# EAGLE board PROIECT TSC v69 (EAGLE 9.7.0)
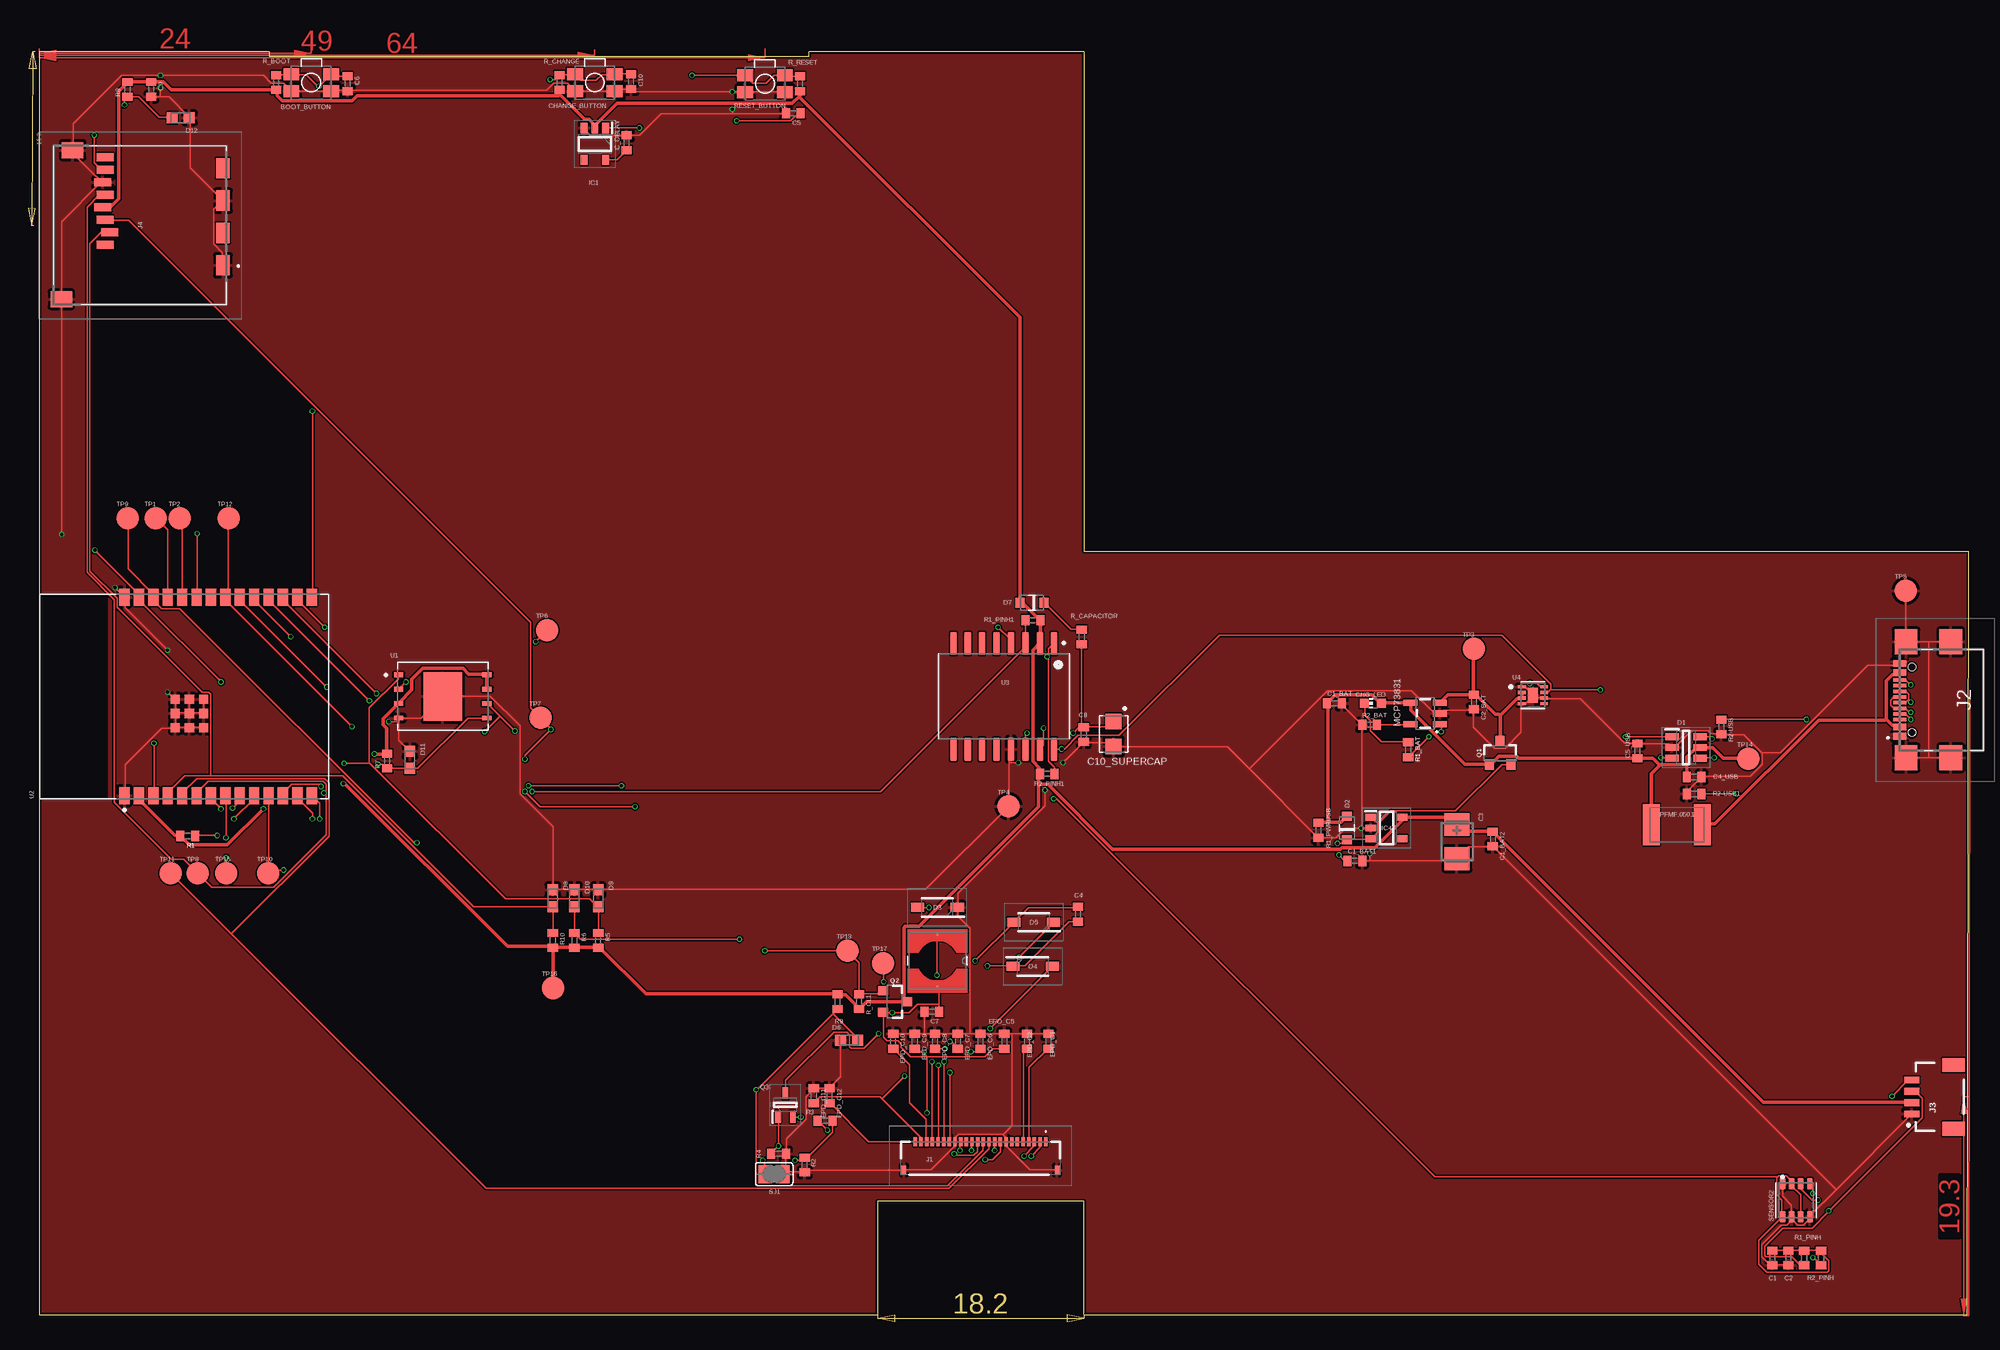
[diagram p0: board, top side]
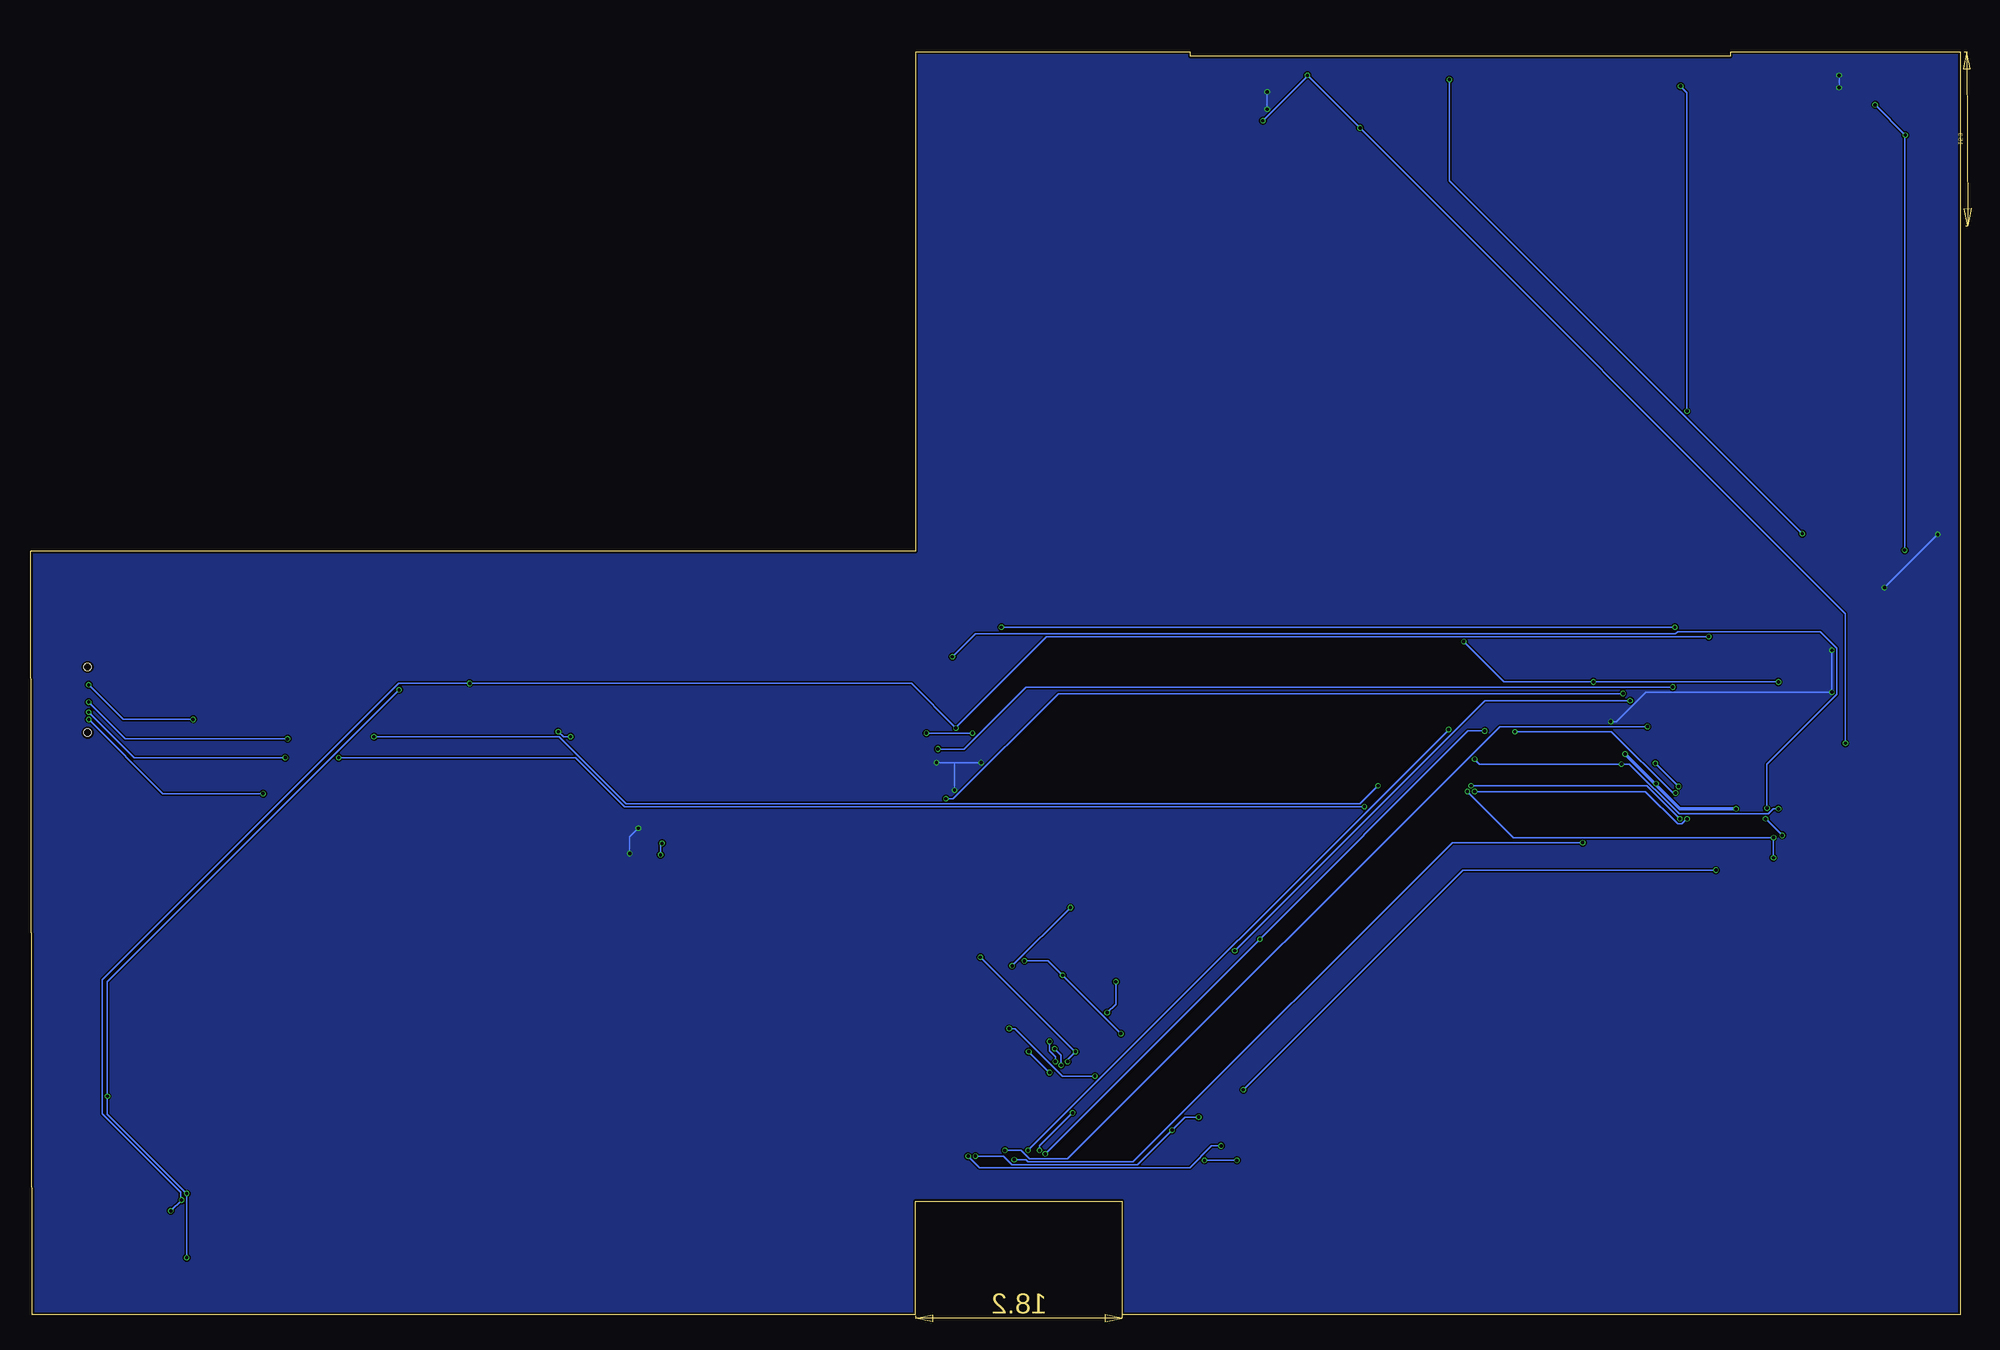
[diagram p1: board, bottom side, seen from below]

Size 170.1 x 111.3 mm. Coordinates in mm from the lower left corner, seen from the top.
Outline: 0,0 73.9,0 73.9,10 92.1,10 92.1,0 170,0 170.1,67.3 92.1,67.3 92.1,111.3 67.9,111.3 67.9,110.9 20.3,110.9 20.3,111.3 0,111.3 0,0
Copper layers (1*16): Top 0.035mm / dielectric 1.6mm / Bottom 0.035mm
Design rules "jlcpcb-2layers.edru": minimum track width 5mil, minimum drill 0.3mm, track to track 5mil, track to pad 5mil, pad to pad 5mil, via to via 5mil, smd to smd 5mil, copper to edge 0.2mm, drill to drill 6mil, minimum pad ring 10mil, minimum via ring 3mil, stop-mask expansion 4mil, vias tented up to drill 0mil, thermal gap 10mil
Net classes: 1 POWER: width 0.3 mm

## Footprints (pad centres in the part's own frame; a part is rotated, then mirrored left to right if it is on the bottom)
MYBUTTON = smd 1.4 x 1.05: 1 1.75,0.75; 2 -1.75,0.75; 3 -1.75,-0.75; 4 1.75,-0.75
EAGLE-LTSPICE_C0402 = smd 0.7 x 0.9: 1 -0.65,0; 2 0.65,0
RCL_CT3528 = smd 2 x 2.2: + -1.5,0; - 1.5,0
CAPCP3225X100N = smd 1.4 x 1.4: 1 -1.1,0; 2 1.1,0
ADAFRUIT_CHIP-LED0603 = smd 0.8 x 0.8: A 0,-0.75; C 0,0.75
SOT95P280X145-6N = smd 1.2 x 0.6: 1 -1.25,0.95; 2 -1.25,0; 3 -1.25,-0.95; 4 1.25,-0.95; 5 1.25,0; 6 1.25,0.95
ESP32_WROVER_AVX---SD0805S020S1R0_AVX_SD0805S020S1R0_0 = smd 0.8 x 0.9: 1 -1.05,0; 2 1.05,0
SOD3716X135N = smd 1.15 x 0.8: 1 -1.75,0; 2 1.75,0
DIOC1608X36N = smd 0.97 x 0.94: 1 -0.75,0; 2 0.75,0
SOT95P280X125-5N = smd 0.9 x 0.6: 1 -1.4,0.95; 2 -1.4,0; 3 -1.4,-0.95; 4 1.4,-0.95; 5 1.4,0.95
SOT95P280X120-5N = smd 0.9 x 0.6: 1 -1.4,0.95; 2 -1.4,0; 3 -1.4,-0.95; 4 1.4,-0.95; 5 1.4,0.95
FH34SRJ24S05SH99 = smd 0.3 x 0.8: 1 5.75,1.45; 2 5.25,1.45; 3 4.75,1.45; 4 4.25,1.45; 5 3.75,1.45; 6 3.25,1.45; 7 2.75,1.45; 8 2.25,1.45; 9 1.75,1.45; 10 1.25,1.45; 11 0.75,1.45; 12 0.25,1.45; 13 -0.25,1.45; 14 -0.75,1.45; 15 -1.25,1.45; 16 -1.75,1.45; 17 -2.25,1.45; 18 -2.75,1.45; 19 -3.25,1.45; 20 -3.75,1.45; 21 -4.25,1.45; 22 -4.75,1.45; 23 -5.25,1.45; 24 -5.75,1.45 | smd 0.4 x 0.8: MP1 6.75,-1.05; MP2 -6.75,-1.05
SAMACSYS_PARTS_USB4110GFA = smd 0.3 x 1.15: A1 -3.35,3.678; A4 -2.55,3.678; A5 -1.25,3.678; A6 -0.25,3.678; A7 0.25,3.678; A8 1.25,3.678; A9 2.55,3.678; A12 3.35,3.678; B1 3.05,3.678; B4 2.25,3.678; B5 1.75,3.678; B6 0.75,3.678; B7 -0.75,3.678; B8 -1.75,3.678; B9 -2.25,3.678; B12 -3.05,3.678 | smd 2.18 x 2: MP1 -5.11,-0.827; MP2 5.11,-0.827; MP3 -5.11,3.103; MP4 5.11,3.103 | hole 0.65: -2.89,2.603; 2.89,2.603
JST04_1MM_RA = smd 0.6 x 1.35: 1 -1.5,0; 2 -0.5,0; 3 0.5,0; 4 1.5,0 | smd 1.2 x 2: NC1 2.8,-3.675; NC2 -2.8,-3.675
112ATAARR03ATTEND = smd 1.8 x 1.2: G1 10.6,10.4; G2 4.9,10.4; S1 7.75,10.4; S2 2.05,10.4 | smd 1.4 x 1.9: G3 13.6,-3.85; G4 0.45,-2.85 | smd 0.7 x 1.5: P1 8.8,0; P2 7.7,0.4; P3 6.6,0; P4 5.5,-0.2; P5 4.4,0; P6 3.3,-0.2; P7 2.2,0; P8 1.1,0
IND_4828-WE-TPC_WRE = smd 0.127 x 0.127: 1 -2.286,0; 2 2.286,0
ESP32_WROVER_SPARKFUN-IC-POWER_SOT23-5 = smd 0.55 x 1.2: 1 -0.95,-1.3; 2 0,-1.3; 3 0.95,-1.3; 4 0.95,1.3; 5 -0.95,1.3
ESP32C6_VARISTOR_CT/CN1812 = smd 1.5 x 3.6: 1 -2.25,0; 2 2.25,0
ESP32_WROVER_SPARKFUN-DISCRETESEMI_SOT23-3 = smd 0.8 x 0.9: 1 -0.95,-1; 2 0.95,-1; 3 0,1.1
SOT65P210X110-3N = smd 1.05 x 0.5: 1 -1.05,0.65; 2 -1.05,-0.65; 3 1.05,0
ESP32_WROVER_EAGLE-LTSPICE_R0402 = smd 0.7 x 0.9: 1 -0.65,0; 2 0.65,0
ESP32_WROVER_BME680_PSON80P300X300X100-8N = smd 1.016 x 0.5: 1 1.458,1.2; 2 1.458,0.4; 3 1.458,-0.4; 4 1.458,-1.2; 5 -1.458,-1.22; 6 -1.458,-0.4; 7 -1.458,0.4; 8 -1.458,1.2
SJ = smd 1.168 x 1.6: 1 -0.762,0; 2 0.762,0
TP20R = smd 2 x 2: TP 0,0
SON127P600X800X80-9N = smd 0.94 x 0.44: 1 -3.895,1.905; 2 -3.895,0.635; 3 -3.895,-0.635; 4 -3.895,-1.905; 5 3.895,-1.905; 6 3.895,-0.635; 7 3.895,0.635; 8 3.895,1.905 | smd 3.4 x 4.3: 9 0,0
XCVR_ESP32-C6-WROOM-1-N8 = smd 1.5 x 0.9: 1 -8.75,5.26; 2 -8.75,3.99; 3 -8.75,2.72; 4 -8.75,1.45; 5 -8.75,0.18; 6 -8.75,-1.09; 7 -8.75,-2.36; 8 -8.75,-3.63; 9 -8.75,-4.9; 10 -8.75,-6.17; 11 -8.75,-7.44; 12 -8.75,-8.71; 13 -8.75,-9.98; 14 -8.75,-11.25; 15 8.75,-11.25; 16 8.75,-9.98; 17 8.75,-8.71; 18 8.75,-7.44; 19 8.75,-6.17; 20 8.75,-4.9; 21 8.75,-3.63; 22 8.75,-2.36; 23 8.75,-1.09; 24 8.75,0.18; 25 8.75,1.45; 26 8.75,2.72; 27 8.75,3.99; 28 8.75,5.26 | smd 0.8 x 0.8: 29_1 -2.755,0.79; 29_2 -1.505,0.79; 29_3 -0.255,0.79; 29_4 -2.755,-0.46; 29_5 -1.505,-0.46; 29_6 -0.255,-0.46; 29_7 -2.755,-1.71; 29_8 -1.505,-1.71; 29_9 -0.255,-1.71
SOIC127P1032X265-16N = smd 2.05 x 0.59: 1 -4.655,4.445; 2 -4.655,3.175; 3 -4.655,1.905; 4 -4.655,0.635; 5 -4.655,-0.635; 6 -4.655,-1.905; 7 -4.655,-3.175; 8 -4.655,-4.445; 9 4.655,-4.445; 10 4.655,-3.175; 11 4.655,-1.905; 12 4.655,-0.635; 13 4.655,0.635; 14 4.655,1.905; 15 4.655,3.175; 16 4.655,4.445
SON50P200X200X80-9N = smd 0.76 x 0.27: 1 -0.985,0.75; 2 -0.985,0.25; 3 -0.985,-0.25; 4 -0.985,-0.75; 5 0.985,-0.75; 6 0.985,-0.25; 7 0.985,0.25; 8 0.985,0.75 | smd 0.9 x 1.3: 9 0,0

## Placement (x,y rotation side)
BOOT_BUTTON  BUTTON_CUSYOMV1  [MYBUTTON]  24,108.6 180 top
C1  100nF  [EAGLE-LTSPICE_C0402]  152.8,5 270 top
C1_BAT  4.7uF  [EAGLE-LTSPICE_C0402]  114.2,53.9 0 top
C1_BAT1  4.7uF  [EAGLE-LTSPICE_C0402]  116,40 0 top
C1_BAT2  4.7uF  [EAGLE-LTSPICE_C0402]  128.15,41.94 270 top
C2  100nF  [EAGLE-LTSPICE_C0402]  154.2,5 270 top
C2_BAT  4.7uF  [EAGLE-LTSPICE_C0402]  126.5,54 270 top
C3  100uF  [RCL_CT3528]  125,41.7 270 top
C4  4.7uF/25V  [EAGLE-LTSPICE_C0402]  91.6,35.3 90 top
C4_USB  100nF  [EAGLE-LTSPICE_C0402]  145.9,47.4 0 top
C5  1uF  [EAGLE-LTSPICE_C0402]  66.5,105.9 180 top
C5_USB  4.7uF  [EAGLE-LTSPICE_C0402]  140.9,49.7 90 top
C6  100nF  [EAGLE-LTSPICE_C0402]  27.2,108.5 270 top
C7  10uF  [EAGLE-LTSPICE_C0402]  78.7,26.7 180 top
C8  100nF  [EAGLE-LTSPICE_C0402]  92.1,51.14 90 top
C9  100uF  [EAGLE-LTSPICE_C0402]  9.9,108 270 top
C10  100nF  [EAGLE-LTSPICE_C0402]  52.2,108.68 270 top
C10_SUPERCAP  CPH3225A  [CAPCP3225X100N]  94.73,51.19 270 top
C_DELAY  100nF  [EAGLE-LTSPICE_C0402]  51.8,103.3 90 top
CHANGE_BUTTON  BUTTON_CUSYOMV1  [MYBUTTON]  49,108.6 180 top
CHG_LED  [ADAFRUIT_CHIP-LED0603]  117.6,53.9 90 top
D1  USBLC6-2SC6Y  [SOT95P280X145-6N]  145.2,50 0 top
D2  ESP32_WROVER_AVX---SD0805S020S1R0_AVX_SD0805S020S1R0_0_0AVX_SD0805S020S1R0_0_0  [ESP32_WROVER_AVX---SD0805S020S1R0_AVX_SD0805S020S1R0_0]  115.3,42.9 90 top
D3  MBR0530  [SOD3716X135N]  79.2,35.9 180 top
D4  MBR0530  [SOD3716X135N]  87.6,30.7 0 top
D5  MBR0530  [SOD3716X135N]  87.7,34.6 180 top
D6  PGB1010603MR  [DIOC1608X36N]  71.4,24.2 0 top
D7  ESP32_WROVER_AVX---SD0805S020S1R0_AVX_SD0805S020S1R0_0_0AVX_SD0805S020S1R0_0_0  [ESP32_WROVER_AVX---SD0805S020S1R0_AVX_SD0805S020S1R0_0]  87.54,62.76 180 top
D8  PGB1010603MR  [DIOC1608X36N]  45.3,36.7 270 top
D9  PGB1010603MR  [DIOC1608X36N]  49.3,36.7 270 top
D10  PGB1010603MR  [DIOC1608X36N]  47.2,36.7 270 top
D11  PGB1010603MR  [DIOC1608X36N]  32.7,48.9 270 top
D12  PGB1010603MR  [DIOC1608X36N]  12.5,105.5 180 top
EPD_C1  1uF/50V  [EAGLE-LTSPICE_C0402]  89,24.1 270 top
EPD_C2  1uF/50V  [EAGLE-LTSPICE_C0402]  87.1,24.1 270 top
EPD_C5  1uF/50V  [EAGLE-LTSPICE_C0402]  85.1,24.1 270 top
EPD_C6  1uF/50V  [EAGLE-LTSPICE_C0402]  83,24.1 270 top
EPD_C7  1uF/50V  [EAGLE-LTSPICE_C0402]  81,24.1 270 top
EPD_C8  1uF/50V  [EAGLE-LTSPICE_C0402]  79,24.1 270 top
EPD_C9  1uF/50V  [EAGLE-LTSPICE_C0402]  77.2,24.1 270 top
EPD_C10  1uF/50V  [EAGLE-LTSPICE_C0402]  75.3,24.1 270 top
EPD_C11  1uF/50V  [EAGLE-LTSPICE_C0402]  68.3,19.3 270 top
EPD_C12  1uF/50V  [EAGLE-LTSPICE_C0402]  69.7,19.3 270 top
IC1  BD5229G-TR  [SOT95P280X125-5N]  49,103.2 270 top
IC4  XC6220A331MR-G  [SOT95P280X120-5N]  118.8,42.9 0 top
J1  FH34SRJ-24S-0.5SH_99_  [FH34SRJ24S05SH99]  83,13.8 0 top
J2  SAMACSYS_PARTS_USB4110-GF-A  [SAMACSYS_PARTS_USB4110GFA]  167.7,54.2 90 top
J3  QWIIC_RIGHT_ANGLE  [JST04_1MM_RA]  165.1,19.2 90 top
J4  112A-TAAR-R03_ATTEND  [112ATAARR03ATTEND]  5.82,103.1 270 top
L1  68uH  [IND_4828-WE-TPC_WRE]  79.2,31.2 270 top
MCP73831  ESP32_WROVER_SPARKFUN-IC-POWER_MCP73831  [ESP32_WROVER_SPARKFUN-IC-POWER_SOT23-5]  122.2,53 90 top
PFMF.050.1  ESP32C6_VARISTORCN1812  [ESP32C6_VARISTOR_CT/CN1812]  144.4,43.2 180 top
Q1  20V/4.2A/52mΩ/1.4W  [ESP32_WROVER_SPARKFUN-DISCRETESEMI_SOT23-3]  128.8,49.5 0 top
Q2  20V/4.2A/52mΩ/1.4W  [ESP32_WROVER_SPARKFUN-DISCRETESEMI_SOT23-3]  75.4,27.6 270 top
Q3  SI1308EDL-T1-GE3  [SOT65P210X110-3N]  65.8,18.5 90 top
R1  10k  [ESP32_WROVER_EAGLE-LTSPICE_R0402]  13.1,42.2 180 top
R1_BAT  200  [ESP32_WROVER_EAGLE-LTSPICE_R0402]  120.7,49.8 270 top
R1_PINH  10k  [ESP32_WROVER_EAGLE-LTSPICE_R0402]  155.6,5 90 top
R1_PINH1  10k  [ESP32_WROVER_EAGLE-LTSPICE_R0402]  87.62,61.21 180 top
R1_PWRUSB  100k  [ESP32_WROVER_EAGLE-LTSPICE_R0402]  112.8,42.7 90 top
R2  2.2  [ESP32_WROVER_EAGLE-LTSPICE_R0402]  67.5,13.2 90 top
R2-USB  5k1  [ESP32_WROVER_EAGLE-LTSPICE_R0402]  148.3,51.8 270 top
R2-USB1  5k1  [ESP32_WROVER_EAGLE-LTSPICE_R0402]  145.9,45.9 0 top
R2_BAT  2k  [ESP32_WROVER_EAGLE-LTSPICE_R0402]  117.3,52 0 top
R2_PINH  10k  [ESP32_WROVER_EAGLE-LTSPICE_R0402]  157.1,5 90 top
R2_PINH1  10k  [ESP32_WROVER_EAGLE-LTSPICE_R0402]  88.88,47.67 0 top
R3  0.47  [ESP32_WROVER_EAGLE-LTSPICE_R0402]  69.3,17.1 180 top
R4  10k  [ESP32_WROVER_EAGLE-LTSPICE_R0402]  65.2,14.2 180 top
R5  10k  [ESP32_WROVER_EAGLE-LTSPICE_R0402]  49.3,33 270 top
R6  10k  [ESP32_WROVER_EAGLE-LTSPICE_R0402]  47.2,33 270 top
R7  10k  [ESP32_WROVER_EAGLE-LTSPICE_R0402]  30.7,48.8 90 top
R8  10k  [ESP32_WROVER_EAGLE-LTSPICE_R0402]  7.8,108 90 top
R9  10k  [ESP32_WROVER_EAGLE-LTSPICE_R0402]  70.4,27.6 90 top
R10  10k  [ESP32_WROVER_EAGLE-LTSPICE_R0402]  45.3,33 270 top
R_BOOT  10k  [ESP32_WROVER_EAGLE-LTSPICE_R0402]  20.9,108.6 270 top
R_CAPACITOR  15  [ESP32_WROVER_EAGLE-LTSPICE_R0402]  91.92,59.74 90 top
R_CHANGE  10k  [ESP32_WROVER_EAGLE-LTSPICE_R0402]  45.9,108.61 270 top
R_CL1  10k  [ESP32_WROVER_EAGLE-LTSPICE_R0402]  72.3,27.6 270 top
R_RESET  10k  [ESP32_WROVER_EAGLE-LTSPICE_R0402]  67.1,108.5 270 top
RESET_BUTTON  BUTTON_CUSYOMV1  [MYBUTTON]  64,108.5 180 top
SENSOR2  ESP32_WROVER_BME680_BME680  [ESP32_WROVER_BME680_PSON80P300X300X100-8N]  154.9,10.1 90 top
SJ1  [SJ]  64.8,12.4 180 top
TP1  TPTP20R  [TP20R]  10.27,70.2 0 top
TP2  TPTP20R  [TP20R]  12.4,70.2 0 top
TP3  TPTP20R  [TP20R]  126.48,58.68 0 top
TP4  TPTP20R  [TP20R]  85.48,44.8 0 top
TP5  TPTP20R  [TP20R]  164.58,63.82 0 top
TP6  TPTP20R  [TP20R]  44.78,60.34 0 top
TP7  TPTP20R  [TP20R]  44.2,52.6 0 top
TP8  TPTP20R  [TP20R]  14,38.9 0 top
TP9  TPTP20R  [TP20R]  7.8,70.2 0 top
TP10  TPTP20R  [TP20R]  20.2,38.9 0 top
TP11  TPTP20R  [TP20R]  11.6,38.9 0 top
TP12  TPTP20R  [TP20R]  16.7,70.2 0 top
TP13  TPTP20R  [TP20R]  71.28,32.08 0 top
TP14  TPTP20R  [TP20R]  150.68,49 0 top
TP15  TPTP20R  [TP20R]  16.5,38.9 0 top
TP16  TPTP20R  [TP20R]  45.3,28.8 0 top
TP17  TPTP20R  [TP20R]  74.4,31 0 top
U1  W25Q512JVEIQ  [SON127P600X800X80-9N]  35.6,54.5 0 top
U2  ESP32-C6-WROOM-1-N8  [XCVR_ESP32-C6-WROOM-1-N8]  12.8,54.5 90 top
U3  DS3231SN#  [SOIC127P1032X265-16N]  85.05,54.5 270 top
U4  MAX17048G+T10  [SON50P200X200X80-9N]  131.7,54.6 0 top

## Library data of the parts
BOOT_BUTTON CHANGE_BUTTON CHG_LED PFMF.050.1 RESET_BUTTON SJ1 TP1-TP17 = DeskAssistant v19 v1
C1 C1_BAT C1_BAT1 C1_BAT2 C2 C2_BAT C4 C4_USB C5 C5_USB C6-C10 C_DELAY EPD_C1 EPD_C2 EPD_C5-EPD_C12 = DeskAssistant v19 v1; SPICEMODEL: NONE; SPICEPREFIX: C
C3 = DeskAssistant v19 v1; SPICEPREFIX: C
C10_SUPERCAP = DeskAssistant v19 v1; AVAILABILITY: Not in stock; CHECK_PRICES: https://www.snapeda.com/parts/CPH3225A/Seiko+Instruments/view-part/?ref=eda; DESCRIPTION: 11 mF (EDLC) Supercapacitor 3.3 V 1210 (3225 Metric) - -; MF: Seiko Instruments; MP: CPH3225A; PACKAGE: 1210 Seiko; PRICE: None; PURCHASE-URL: https://www.snapeda.com/api/url_track_click_mouser/?unipart_id=562593&manufacturer=Seiko Instruments&part_name=CPH3225A&search_term=None; SNAPEDA_LINK: https://www.snapeda.com/parts/CPH3225A/Seiko+Instruments/view-part/?ref=snap
D1 = DeskAssistant v19 v1; AVAILABILITY: In Stock; CHECK_PRICES: https://www.snapeda.com/parts/USBLC6-2SC6Y/STMicroelectronics/view-part/?ref=eda; DESCRIPTION: 17V Clamp 5A (8/20µs) Ipp Tvs Diode Surface Mount SOT-23-6; MF: STMicroelectronics; MP: USBLC6-2SC6Y; PACKAGE: SOT-23-6 STMicroelectronics; PRICE: None; SNAPEDA_LINK: https://www.snapeda.com/parts/USBLC6-2SC6Y/STMicroelectronics/view-part/?ref=snap
D2 D7 = DeskAssistant v19 v1; CENTROID_NOT_SPECIFIED: No; DATASHEET: http://datasheets.avx.com/schottky.pdf; DIGIKEY_DESCRIPTION: DIODE SCHOTTKY 20V 1A 0805; DIGIKEY_PART_NUMBER: 478-7800-1-ND; LEAD_FREE: yes; MF: AVX; MOUSER_PART_NUMBER: 581-SD0805S020S1R0; PACKAGE: 0805 (2012 metric); PREFIX: D; ROHS: yes; TEMPERATURE_RANGE_HIGH: +125°C; TEMPERATURE_RANGE_LOW: -55°C
D3-D5 = DeskAssistant v19 v1; AVAILABILITY: In Stock; CHECK_PRICES: https://www.snapeda.com/parts/MBR0530/Onsemi/view-part/?ref=eda; DESCRIPTION: Diode Schottky 30 V 500mA Surface Mount SOD-123; MF: ON Semiconductor; MP: MBR0530; PACKAGE: SOD-123-2 ON Semiconductor; PRICE: None; PURCHASE-URL: https://www.snapeda.com/api/url_track_click_mouser/?unipart_id=179458&manufacturer=ON Semiconductor&part_name=MBR0530&search_term=None; SNAPEDA_LINK: https://www.snapeda.com/parts/MBR0530/Onsemi/view-part/?ref=snap
D6 D8-D12 = DeskAssistant v19 v1; AVAILABILITY: In Stock; CHECK_PRICES: https://www.snapeda.com/parts/PGB1010603MR/Littelfuse/view-part/?ref=eda; DESCRIPTION: 150V (Typ) Clamp - Ipp Tvs Diode Surface Mount 0603 (1608 Metric); MF: Littelfuse Inc.; MP: PGB1010603MR; PACKAGE: 0603 Littelfuse Inc.; PRICE: None; PURCHASE-URL: https://www.snapeda.com/api/url_track_click_mouser/?unipart_id=5659453&manufacturer=Littelfuse Inc.&part_name=PGB1010603MR&search_term=None; SNAPEDA_LINK: https://www.snapeda.com/parts/PGB1010603MR/Littelfuse/view-part/?ref=snap
IC1 = DeskAssistant v19 v1; DESCRIPTION: Voltage Detector with Adjustable Delay Time: CMOS processes are utilized to develop high precision, low current consumption CMOS reset ICs that allow arbitrary setting of the delay time. The extensive lineup includes both Nch Open Drain and CMOS output types in a wide range of detection voltages (from 2.3V to 6.0V, in 0.1V steps), enabling selection of the ideal solution based on customer requirements. In addition, the entire series is of course both lead-free and RoHS-compliant.; HEIGHT: 1.25mm; MANUFACTURER_NAME: ROHM Semiconductor; MANUFACTURER_PART_NUMBER: BD5229G-TR; MOUSER_PART_NUMBER: 755-BD5229G-TR; MOUSER_PRICE-STOCK: https://www.mouser.co.uk/ProductDetail/ROHM-Semiconductor/BD5229G-TR?qs=4kLU8WoGk0vvnhrrYwdszw%3D%3D
IC4 = DeskAssistant v19 v1; DESCRIPTION: LDO Voltage Regulators; HEIGHT: 1.2mm; MANUFACTURER_NAME: Torex; MANUFACTURER_PART_NUMBER: XC6220A331MR-G; MOUSER_PART_NUMBER: 865-XC6220A331MR-G; MOUSER_PRICE-STOCK: https://www.mouser.co.uk/ProductDetail/Torex-Semiconductor/XC6220A331MR-G?qs=AsjdqWjXhJ8ZSWznL1J0gg%3D%3D
J1 = DeskAssistant v19 v1; DESCRIPTION: 24 Position FFC, FPC Connector Contacts, Top and Bottom 0.020" (0.50mm) Surface Mount, Right Angle; HEIGHT: 1.1mm; MANUFACTURER_NAME: Hirose; MANUFACTURER_PART_NUMBER: FH34SRJ-24S-0.5SH(99); MOUSER_PART_NUMBER: 798-FH34SRJ24S05SH99; MOUSER_PRICE-STOCK: https://www.mouser.co.uk/ProductDetail/Hirose-Connector/FH34SRJ-24S-0.5SH99?qs=vcbW%252B4%252BSTIpKBl5ap9J8Fw%3D%3D
J2 = DeskAssistant v19 v1; DESCRIPTION: CONN USB 2.0 TYPE-C R/A SMT; HEIGHT: 3.26mm; MANUFACTURER_NAME: GCT (GLOBAL CONNECTOR TECHNOLOGY); MANUFACTURER_PART_NUMBER: USB4110-GF-A; MOUSER_PART_NUMBER: 640-USB4110-GF-A; MOUSER_PRICE-STOCK: https://www.mouser.co.uk/ProductDetail/GCT/USB4110-GF-A?qs=KUoIvG%2F9IlYiZvIXQjyJeA%3D%3D
J3 = DeskAssistant v19 v1; PROD_ID: CONN-13694
J4 = DeskAssistant v19 v1; DESCRIPTION: Micro SD Card Socket, Push-Push Type, Top Mount, SMT, H=1.83mm, 10u; HEIGHT: 1.9mm; MANUFACTURER_NAME: ATTEND; MANUFACTURER_PART_NUMBER: 112A-TAAR-R03 ATTEND
L1 = DeskAssistant v19 v1; COPYRIGHT: Copyright (C) 2024 Ultra Librarian. All rights reserved.; MANUFACTURER_PART_NUMBER: 744043680; MFR_NAME: Wurth Electronics
MCP73831 = DeskAssistant v19 v1; PROD_ID: IC-09995
Q1 Q2 = DeskAssistant v19 v1; PROD_ID: TRAN-14388
Q3 = DeskAssistant v19 v1; AVAILABILITY: In Stock; CHECK_PRICES: https://www.snapeda.com/parts/SI1308EDL-T1-GE3/Vishay+Siliconix/view-part/?ref=eda; DESCRIPTION: Si1308EDL-T1-GE3 N-channel MOSFET Transistor, 1.5 A, 30 V, 3-Pin SC-70 | Siliconix / Vishay SI1308EDL-T1-GE3; MF: Vishay Siliconix; MP: SI1308EDL-T1-GE3; PACKAGE: SOT-323 Vishay Semiconductor; PRICE: None; PURCHASE-URL: https://www.snapeda.com/api/url_track_click_mouser/?unipart_id=274603&manufacturer=Vishay Siliconix&part_name=SI1308EDL-T1-GE3&search_term=None; SNAPEDA_LINK: https://www.snapeda.com/parts/SI1308EDL-T1-GE3/Vishay+Siliconix/view-part/?ref=snap
R1 R1_BAT R1_PINH R1_PINH1 R1_PWRUSB R2 R2-USB R2-USB1 R2_BAT R2_PINH R2_PINH1 R3-R10 R_BOOT R_CAPACITOR R_CHANGE R_CL1 R_RESET = DeskAssistant v19 v1; SPICEMODEL: NONE; SPICEPREFIX: R
SENSOR2 = DeskAssistant v19 v1; AVAILABILITY: Unavailable; DESCRIPTION: Integrated Environmental Unit; MF: Bosch Sensortec; MP: BME680; PACKAGE: LGA-8 Bosch Tools; PRICE: None
U1 = DeskAssistant v19 v1; AVAILABILITY: In Stock; CHECK_PRICES: https://www.snapeda.com/parts/W25Q512JVEIQ/Winbond+Electronics/view-part/?ref=eda; DESCRIPTION: FLASH - NOR Memory IC 512Mb (64M x 8) SPI - Quad I/O 133 MHz 8-WSON (8x6); MF: Winbond Electronics; MP: W25Q512JVEIQ; PACKAGE: Package; PRICE: None; SNAPEDA_LINK: https://www.snapeda.com/parts/W25Q512JVEIQ/Winbond+Electronics/view-part/?ref=snap
U2 = DeskAssistant v19 v1; AVAILABILITY: In Stock; CHECK_PRICES: https://www.snapeda.com/parts/ESP32-C6-WROOM-1-N8/Espressif+Systems/view-part/?ref=eda; DESCRIPTION: Multiprotocol Modules ESP32-C6 module, Wi-Fi 6 in 2.4 GHz band, Bluetooth 5, Zigbee 3.0 and Thread. ESP34-WROOM Compatible - ENGINEERING SAMPLE; MF: Espressif Systems; MP: ESP32-C6-WROOM-1-N8; PACKAGE: None; PRICE: None; SNAPEDA_LINK: https://www.snapeda.com/parts/ESP32-C6-WROOM-1-N8/Espressif+Systems/view-part/?ref=snap
U3 = DeskAssistant v19 v1; AVAILABILITY: In Stock; CHECK_PRICES: https://www.snapeda.com/parts/DS3231SN%23/Analog+Devices/view-part/?ref=eda; DESCRIPTION: Extremely Accurate I²C-Integrated RTC/TCXO/Crystal; MF: Analog Devices; MP: DS3231SN#; PACKAGE: SOIC-16 Maxim; PRICE: None; PURCHASE-URL: https://www.snapeda.com/api/url_track_click_mouser/?unipart_id=99048&manufacturer=Analog Devices&part_name=DS3231SN#&search_term=None; SNAPEDA_LINK: https://www.snapeda.com/parts/DS3231SN%23/Analog+Devices/view-part/?ref=snap
U4 = DeskAssistant v19 v1; AVAILABILITY: In Stock; CHECK_PRICES: https://www.snapeda.com/parts/MAX17048G+T10/Analog+Devices/view-part/?ref=eda; DESCRIPTION: 3µA 1-Cell/2-Cell Fuel Gauge with ModelGauge; MF: Analog Devices; MP: MAX17048G+T10; PACKAGE: TDFN-8 Maxim; PRICE: None; PURCHASE-URL: https://www.snapeda.com/api/url_track_click_mouser/?unipart_id=329239&manufacturer=Analog Devices&part_name=MAX17048G+T10&search_term=None; SNAPEDA_LINK: https://www.snapeda.com/parts/MAX17048G+T10/Analog+Devices/view-part/?ref=snap

## Nets
3V3 [POWER]: C1_BAT2.1 C3.+ C9.1 D7.2 IC1.2 IC4.5 J3.2 J4.P4 Q2.3 R1.2 R1_PINH1.1 R2_PINH1.1 R5.2 R6.2 R7.2 R8.2 R9.2 R10.2 R_BOOT.2 R_CHANGE.2 R_CL1.2 R_RESET.2 TP16.TP U1.3 U1.7 U1.8 U2.2 U3.2
32KHZ: R2_PINH1.2 U2.9 U3.1
DN: D1.4 J2.A7 J2.B7
DP: D1.6 J2.A6 J2.B6
EPD_3V3: C7.1 EPD_C5.2 J1.15 J1.16 L1.2 Q2.2 TP17.TP
EPD_3V3_C: Q2.1 R_CL1.1 TP13.TP U2.18
EPD_BUSY: J1.9 TP9.TP U2.26
EPD_CS: D6.2 J1.12 R9.1 TP10.TP U2.11
EPD_DC: J1.11 TP11.TP U2.5
EPD_RST: J1.10 TP12.TP U2.21
FLASH_CS: D9.2 R5.1 U1.1 U2.12
GDR: J1.2 Q3.1 R4.2
GND: BOOT_BUTTON.1 BOOT_BUTTON.2 C1.2 C1_BAT1.2 C1_BAT2.2 C1_BAT.2 C2.2 C2_BAT.2 C3.- C4_USB.2 C5.2 C5_USB.2 C6.2 C7.2 C8.1 C9.2 C10.2 C10_SUPERCAP.2 C_DELAY.2 CHANGE_BUTTON.1 CHANGE_BUTTON.2 D1.2 D3.1 D6.1 D8.1 D9.1 D10.1 D11.1 D12.1 EPD_C1.1 EPD_C2.1 EPD_C5.1 EPD_C6.1 EPD_C7.1 EPD_C8.1 EPD_C9.1 EPD_C10.1 EPD_C11.1 EPD_C12.1 IC1.3 IC4.2 J1.8 J1.17 J1.MP1 J1.MP2 J2.A1 J2.A12 J2.B1 J2.B12 J2.MP1 J2.MP2 J2.MP3 J2.MP4 J3.1 J4.G1 J4.G2 J4.G3 J4.G4 J4.P6 MCP73831.2 R1_PWRUSB.1 R2-USB1.1 R2-USB.2 R2.1 R2_BAT.1 R4.1 RESET_BUTTON.1 RESET_BUTTON.2 SENSOR2.1 SENSOR2.5 SENSOR2.7 SJ1.1 TP4.TP TP5.TP U1.4 U1.9 U2.1 U2.28 U2.29_1 U2.29_2 U2.29_3 U2.29_4 U2.29_5 U2.29_6 U2.29_7 U2.29_8 U2.29_9 U3.13 U4.1 U4.4 U4.6 U4.9
GPIO8: R1.1 U2.10
I2C_PW: C1.1 C2.1 R1_PINH.2 R2_PINH.2 SENSOR2.2 SENSOR2.6 SENSOR2.8 U2.17
INT_RTC: R1_PINH1.2 TP15.TP U2.8 U3.3
IO/BOOT: BOOT_BUTTON.3 BOOT_BUTTON.4 C6.1 R_BOOT.1 U2.15
IO/CHANGE: C10.1 CHANGE_BUTTON.3 CHANGE_BUTTON.4 R_CHANGE.1 U2.23
MISO: D12.2 J4.P7 R8.1 TP6.TP U1.2 U2.27
MOSI: D11.2 J1.14 J4.P3 R7.1 TP7.TP U1.5 U2.7
N$1: C4.1 D3.2 D4.1
N$2: J2.A5 R2-USB1.2
N$3: MCP73831.1 R1_BAT.2
N$4: C1_BAT1.1 D2.1 IC4.1 IC4.3 Q1.2
N$5: CHG_LED.C R1_BAT.1
N$6: MCP73831.5 R2_BAT.2
N$7: EPD_C12.2 J1.24
N$8: EPD_C8.2 J1.20
N$9: EPD_C10.2 J1.22
N$10: EPD_C7.2 J1.19
N$11: EPD_C6.2 J1.18
N$12: J2.B5 R2-USB.1
N$13: EPD_C2.2 J1.5
N$14: EPD_C1.2 J1.4
N$18: C_DELAY.1 IC1.5
N$19: D7.1 R_CAPACITOR.2
PREVGH: D5.1 EPD_C9.2 J1.21
PREVGL: D4.2 EPD_C11.2 J1.23
RESE: J1.3 Q3.2 R3.2
RESE': R2.2 R3.1 SJ1.2
RESET: C5.1 IC1.1 R_RESET.1 RESET_BUTTON.3 RESET_BUTTON.4 U2.3
RTC_RST: U2.16 U3.4
RX: TP2.TP U2.24
SCK: D10.2 J1.13 J4.P5 R6.1 TP8.TP U1.6 U2.6
SCL: J3.4 R2_PINH.1 SENSOR2.4 U2.20 U3.16 U4.7
SDA: J3.3 R1_PINH.1 SENSOR2.3 U2.19 U3.15 U4.8
SRC: C4.2 D5.2 L1.1 Q3.3
SS_SD: D8.2 J4.P2 R10.1 U2.4
TX: TP1.TP U2.25
USB_D+: D1.1 U2.14
USB_D-: D1.3 U2.13
VBAT [POWER]: C2_BAT.1 MCP73831.3 Q1.3 TP3.TP U4.2 U4.3
VBUS [POWER]: C1_BAT.1 C4_USB.1 C5_USB.1 CHG_LED.A D1.5 D2.2 MCP73831.4 PFMF.050.1.2 Q1.1 R1_PWRUSB.2 TP14.TP
VRTC: C8.2 C10_SUPERCAP.1 R_CAPACITOR.1 U3.14
VUSB [POWER]: J2.A4 J2.A9 J2.B4 J2.B9 PFMF.050.1.1

## Tracks (layer width: path | path; a pad name or v marks a point on that pad's centre or on a via)
3V3  (via drill 0.3)
  Top 0.3: 45.95,107.52 45.95,107.9 R_CHANGE.2 | 45.95,107.52 48.11,105.36 48.49,105.36 48.99,104.85 IC1.2 49.12,104.92 50.96,106.76 66.39,106.76 67,107.36 | 67,107.36 67.09,107.46 R_RESET.2 | J4.P4 5.62,97.62 6.26,97.62 7.02,98.38 7.02,107.84 7.72,108.54 R8.2 7.85,108.67 9.88,108.67 C9.1 10.01,108.67 10.96,108.67 11.66,107.97 20.86,107.97 R_BOOT.2 20.99,107.84 20.99,107.46 21.44,107.01 27.6,107.01 28.04,107.46 45.82,107.46 45.95,107.52 | J3.2 165.07,18.75 151.99,18.75 128.24,42.5 C1_BAT2.1 128.12,42.63 125.64,42.63 125.13,43.13 C3.+ 124.94,43.26 124.37,43.83 120.24,43.83 IC4.5 120.18,43.7 120.18,43.58 117.77,41.16 114.84,41.16 114.72,41.04 94.65,41.04 88.94,46.75 88.11,46.75 | U2.2 8.86,45.74 8.86,45.36 11.97,42.24 12.42,42.24 R1.2 12.55,42.12 13.25,41.42 16.61,41.42 v19.78,44.59 | U1.7 39.47,55.13 39.47,56.41 U1.8 39.34,56.47 37.88,56.47 37.38,56.98 33.82,56.98 32.87,56.02 32.87,55.07 31.79,53.99 U1.3 31.66,53.87 30.33,52.53 30.33,52.02 30.64,51.71 30.64,49.48 R7.2 30.52,49.42 v29.56,49.42 | R10.2 45.31,32.4 47.15,32.4 R6.2 47.34,32.4 49.25,32.4 R5.2 49.44,32.34 53.5,28.27 70.27,28.27 R9.2 70.46,28.21 71.09,28.21 72.3,27 R_CL1.2 72.43,27.07 72.94,27.58 76.49,27.58 Q2.3 76.24,27.7 76.24,34.12 76.36,34.24 77.57,34.24 88.11,44.78 88.11,46.75 | TP16.TP 45.31,28.85 45.31,32.21 R10.2 | 88.11,46.75 88.11,47.58 R2_PINH1.1 88.17,47.7 88.17,48.21 87.6,48.78 87.6,58.56 88.17,59.14 U3.2 88.3,59.26 88.3,61.17 R1_PINH1.1 88.17,61.3 86.71,62.76 86.52,62.76 D7.2 86.46,62.88 86.46,87.9 67,107.36 | v26.83,46.82 26.96,46.82 41.31,32.47 45.19,32.47 R10.2
  Bottom 0.3: v19.78,44.59 24.74,44.59 26.9,46.75 | v29.56,49.42 26.9,46.75 | v26.83,46.82 26.9,46.75
32KHZ  (via drill 0.3)
  Top 0.127: 89,57.99 89,58.69 89.44,59.14 U3.1 | 89,57.99 89,48.78 89.51,48.28 89.51,47.7 R2_PINH1.2 | v17.06,44.66 17.69,45.29 17.69,45.74 U2.9 | 89,57.99 v88.87,57.99
  Bottom 0.127: v17.06,44.66 17.06,48.53 10.89,54.69 10.89,58.76 12.36,60.22 24.93,60.22 25.12,60.02 86.84,60.02 v88.87,57.99
DN  (via drill 0.3)
  Top 0.127: J2.A7 163.99,54.44 163.49,54.44 163.23,54.18 163.23,53.74 163.49,53.48 163.99,53.48 J2.B7 164.06,53.42 164.57,53.42 164.88,53.1 v165.01,53.1 | v147.68,49.1 146.47,49.1 D1.4
  Bottom 0.127: v147.68,49.1 161.01,49.1 v165.01,53.1
DP  (via drill 0.3)
  Top 0.127: 164.79,54.21 164.82,54.25 164.82,54.69 164.57,54.95 164.06,54.95 J2.B6 | 164.79,54.21 164.57,53.99 164.06,53.99 J2.A6 | v147.48,50.75 147.29,50.94 146.47,50.94 D1.6 | 164.79,54.21 v165.01,53.99
  Bottom 0.127: v147.48,50.75 161.77,50.75 v165.01,53.99
EPD_3V3  (via drill 0.3)
  Top 0.127: 79.35,27.39 79.35,28.78 79.22,28.91 L1.2 | 79.35,27.39 79.35,26.75 C7.1 | J1.15 81.7,15.26 J1.16 81.19,15.19 v81.19,14.49 | 78.27,22.75 76.81,22.75 75.98,23.58 75.98,23.89 75.73,24.15 74.78,24.15 74.46,24.46 74.46,26.62 Q2.2 74.52,26.62 v75.22,26.62 76.68,26.62 77.44,27.39 79.35,27.39 | 78.27,22.75 83.41,22.75 84.11,23.45 85.06,23.45 EPD_C5.2 | 78.27,22.75 v78.27,17.8 | v74.46,29.35 74.46,30.94 TP17.TP
  Bottom 0.127: v81.19,14.49 81.19,14.88 v78.27,17.8 | v74.46,29.35 74.46,27.39 v75.22,26.62
EPD_3V3_C  (via drill 0.3)
  Top 0.127: 72.3,28.27 74.14,28.27 74.4,28.53 Q2.1 | v29.12,54.12 20.29,62.95 20.29,63.2 U2.18 | v63.98,32.08 71.22,32.08 TP13.TP 71.28,32.02 72.3,31 72.3,28.27 | 72.3,28.27 R_CL1.1
  Bottom 0.127: v29.12,54.12 41.95,54.12 v63.98,32.08
EPD_BUSY  (via drill 0.3)
  Top 0.127: v83.41,13.67 84.05,13.67 84.75,14.37 84.75,15.19 J1.9 | v33.31,41.61 33.06,41.61 12.42,62.25 10.83,62.25 10.13,62.95 10.13,63.2 U2.26 10.07,63.26 10.07,63.52 7.85,65.74 7.85,70.18 TP9.TP
  Bottom 0.127: v83.41,13.67 82.4,13.67 82.21,13.48 72.94,13.48 44.8,41.61 v33.31,41.61
EPD_CS  (via drill 0.3)
  Top 0.127: 20.23,39.2 20.23,38.94 TP10.TP 20.23,39.2 | 20.23,39.2 20.23,45.74 U2.11 | 69.98,26.53 R9.1 | 69.98,26.53 63.25,19.8 | 63.25,19.8 63.22,19.77 63.22,11.51 63.35,11.38 80.11,11.38 83.22,14.49 83.22,15.19 J1.12 | 69.98,26.53 72.11,24.4 72.11,24.21 D6.2 | v21.56,39.2 20.23,39.2 | v63.22,19.83 63.25,19.8
  Bottom 0.127: v21.56,39.2 43.85,39.2 v63.22,19.83
EPD_DC
  Top 0.127: 16.96,33.58 11.66,38.88 TP11.TP | 16.96,33.58 39.41,11.13 80.24,11.13 83.73,14.62 83.73,15.19 J1.11 | 16.96,33.58 25.56,42.18 25.56,46.88 25.18,47.26 13.88,47.26 12.67,46.05 12.67,45.8 U2.5
EPD_RST  (via drill 0.3)
  Top 0.127: v84.24,14.49 84.24,15.19 J1.10 | v27.6,51.83 16.48,62.95 16.48,63.2 U2.21 16.48,63.26 16.67,63.45 16.67,70.18 TP12.TP
  Bottom 0.127: v84.24,14.49 82.84,14.49 82.08,13.73 78.71,13.73 40.61,51.83 v27.6,51.83
FLASH_CS  (via drill 0.3)
  Top 0.127: R5.1 49.31,33.67 49.31,35.89 D9.2 49.25,35.96 48.55,36.66 41.12,36.66 29.15,48.63 | 29.15,48.63 29.12,48.66 29.12,53.48 31.66,56.02 31.66,56.41 U1.1 | v24.87,46.56 24.67,46.75 22.26,46.75 21.56,46.05 21.56,45.8 U2.12 | v26.9,48.59 29.12,48.59 29.15,48.63
  Bottom 0.127: v26.9,48.59 v24.87,46.56
GDR  (via drill 0.3)
  Top 0.127: v87.48,13.99 88.24,14.75 88.24,15.19 J1.2 | R4.2 64.55,14.24 v65.19,14.88 65.19,17.42 Q3.1
  Bottom 0.127: v87.48,13.99 86.46,12.97 67.92,12.97 66.01,14.88 v65.19,14.88
GND  (via drill 0.3)
  Top 0.127: 10.7,107.33 11.47,107.33 13.25,105.55 D12.1 13.31,105.49 13.31,101.11 16.17,98.25 J4.G2 16.17,98.19 15.4,97.43 15.4,94.38 16.17,93.62 16.17,92.54 J4.G1 | 10.7,107.33 9.94,107.33 C9.2 | IC1.3 48.11,104.54 48.11,104.41 48.61,103.9 51.79,103.9 C_DELAY.2 51.85,103.97 52.93,103.97 54.84,105.87 61.12,105.87 | 61.12,105.87 65.82,105.87 C5.2 | RESET_BUTTON.2 65.7,107.78 62.27,107.78 RESET_BUTTON.1 62.2,107.78 v61.12,107.78 52.49,107.78 52.23,108.03 C10.2 52.17,108.03 50.9,108.03 50.77,107.9 CHANGE_BUTTON.2 50.71,107.84 47.28,107.84 CHANGE_BUTTON.1 47.22,107.9 46.58,108.54 45.38,108.54 44.74,107.9 27.22,107.9 C6.2 27.15,107.9 25.76,107.9 BOOT_BUTTON.2 25.69,107.84 22.26,107.84 BOOT_BUTTON.1 22.2,107.9 21.56,108.54 20.48,108.54 19.78,109.24 v10.7,109.24 7.28,109.24 3.02,104.98 3.02,102.7 J4.G4 3.02,102.63 3.02,102.32 4.99,100.35 5.05,100.35 5.56,99.84 J4.P6 5.5,99.84 2,96.35 2,89.55 J4.G3 2,89.49 v2,68.79 | v61.12,106.25 61.12,105.87 | v10.7,108.16 10.7,107.33 | U2.29_9 14.52,54.18 14.52,53.04 U2.29_8 14.45,53.04 13.31,53.04 U2.29_5 | U2.29_1 12.04,51.77 12.04,52.98 U2.29_2 | U2.29_2 12.04,53.04 12.04,54.18 U2.29_3 11.97,54.25 v11.34,54.88 | U2.29_1 12.1,51.77 13.25,51.77 U2.29_4 13.31,51.77 14.45,51.77 U2.29_7 | U2.29_5 13.25,53.04 12.1,53.04 U2.29_2 | U2.29_6 13.25,54.18 13.25,53.1 U2.29_5 | U2.1 7.59,45.8 7.59,48.47 10.83,51.71 11.97,51.71 U2.29_1 | v11.34,58.56 7.59,62.31 7.59,63.2 U2.28 7.53,63.26 v6.7,64.09 | 31.72,52.28 31.72,50.63 D11.1 | 31.72,52.28 31.72,52.59 | 31.72,52.59 33.69,52.59 U1.9 39.79,54.5 42.39,51.9 42.39,45.93 45.31,43.01 45.31,37.55 D8.1 45.31,37.48 47.15,37.48 D10.1 47.22,37.48 49.25,37.48 D9.1 49.31,37.48 78.14,37.48 85.44,44.78 TP4.TP 85.51,44.85 85.51,48.66
  Top 0.127: 31.72,52.59 U1.4 | 31.72,52.28 v30.83,52.28 | J2.B12 164.06,51.13 164.06,50.88 J2.A1 164.06,50.82 164.06,49.61 164.57,49.1 J2.MP3 164.63,49.1 166.6,49.1 | 166.6,49.1 168.5,49.1 J2.MP1 | J2.MP4 164.57,59.26 164.06,58.76 164.06,57.61 J2.A12 164.06,57.55 164.06,57.29 J2.B1 163.99,57.23 161.2,57.23 153.52,49.55 151.93,49.55 151.9,49.52 | TP5.TP 164.57,63.77 164.57,59.33 J2.MP4 | 166.6,59.33 164.63,59.33 J2.MP4 | 166.6,59.33 168.5,59.33 J2.MP2 | 166.6,59.33 166.6,49.1 | U4.9 131.74,54.56 131.04,53.87 130.72,53.87 U4.4 130.66,53.8 130.66,51.33 129.26,49.93 128.31,49.93 126.47,51.77 126.47,53.23 C2_BAT.2 126.47,53.29 123.8,53.29 123.54,53.04 MCP73831.2 123.48,53.04 122.97,53.04 121,55.01 113.58,55.01 106.69,48.12 | U4.1 130.72,55.33 131.04,55.33 131.74,54.63 U4.9 | U4.9 131.8,54.56 131.99,54.37 132.62,54.37 U4.6 132.69,54.31 135.86,54.31 139.8,50.37 140.88,50.37 C5_USB.2 140.94,50.31 143.67,50.31 143.93,50.05 D1.2 143.99,50.05 144.25,50.05 145.64,51.45 147.17,51.45 147.42,51.2 148.25,51.2 R2-USB.2 148.31,51.13 150.28,51.13 151.9,49.52 | R2-USB1.1 145.26,45.93 145.26,46.12 146.53,47.39 C4_USB.2 146.59,47.45 150.85,47.45 151.93,48.53 151.93,49.48 151.9,49.52 | EPD_C10.1 75.35,24.78 77.19,24.78 EPD_C9.1 77.25,24.78 78.08,24.78 | 78.08,24.78 78.97,24.78 EPD_C8.1 79.03,24.78 81,24.78 EPD_C7.1 81.06,24.78 82.08,24.78 | 78.08,24.78 78.08,26.69 C7.2 | 85.76,24.78 87.09,24.78 EPD_C2.1 87.16,24.78 88.94,24.78 EPD_C1.1 | 85.76,24.78 85.13,24.78 EPD_C5.1 85.06,24.78 83.03,24.78 EPD_C6.1 82.97,24.78 82.08,24.78 | 82.08,24.78 82.08,34.05 81,35.13 81,35.89 D3.1 81,35.96 81,37.16 88.68,44.85 v88.68,46.24
  Top 0.127: 84.97,15.86 84.94,15.89 81.06,15.89 80.81,15.64 80.81,15.26 J1.17 80.75,15.19 80.75,14.88 78.65,12.78 76.3,12.78 J1.MP2 76.24,12.72 67.66,12.72 67.54,12.59 R2.1 67.47,12.59 65.76,12.59 SJ1.1 65.57,12.46 65.82,12.72 65.82,14.18 R4.1 65.89,14.24 65.89,15.51 67.6,17.23 67.6,19.19 68.3,19.89 EPD_C11.1 68.36,19.96 EPD_C12.1 69.7,20.02 70.65,20.97 70.65,24.15 D6.1 | 84.97,15.86 85.19,15.64 85.19,15.26 J1.8 85.25,15.19 85.25,14.88 87.35,12.78 89.7,12.78 J1.MP1 | 85.76,24.78 85.76,16.65 84.97,15.86 | C2.2 154.15,4.4 152.82,4.4 C1.2 152.75,4.4 152.56,4.4 151.87,5.1 151.87,6.18 153.58,7.89 154.09,7.89 154.53,8.34 SENSOR2.7 | SENSOR2.7 154.53,8.59 154.53,8.4 155.04,7.89 155.55,7.89 156.12,8.46 SENSOR2.5 156.12,8.72 158.44,11.03 | SENSOR2.1 153.71,11.51 153.71,10.43 154.47,9.67 154.47,8.65 SENSOR2.7 | 158.44,11.03 165.07,17.67 J3.1 | 117.32,40.02 124.81,40.02 124.94,40.15 C3.- 125,40.21 126.02,41.23 128.12,41.23 C1_BAT2.2 128.18,41.29 158.44,11.03 | 117.32,40.02 116.69,40.02 C1_BAT1.2 | 85.51,48.66 85.51,49.67 85.64,49.8 U3.13 | C1_BAT.2 114.91,53.87 114.91,53.74 116.62,52.02 R2_BAT.1 116.62,51.96 116.62,42.88 | 116.62,42.88 117.38,42.88 IC4.2 | 116.62,42.88 v116.56,42.88 115.16,42.88 114.34,42.05 112.81,42.05 R1_PWRUSB.1 112.75,42.05 106.69,48.12 | 106.69,48.12 104.75,50.05 94.78,50.05 C10_SUPERCAP.2 94.72,50.12 94.4,50.44 92.11,50.44 C8.1 92.05,50.44 v90.27,48.66 | v86.33,48.66 85.51,48.66 | v117.32,40.66 117.32,40.02
  Bottom 0.127: v61.12,107.78 v61.12,106.25 | v10.7,109.24 v10.7,108.16 | v11.34,58.56 v11.34,54.88 27.72,54.88 30.33,52.28 v30.83,52.28 | v90.27,48.66 88.68,48.66 | 88.68,48.66 v86.33,48.66 | v117.32,40.66 117.32,42.12 v116.56,42.88 | 88.68,48.66 v88.68,46.24 | v6.7,64.09 v2,68.79
  pour Top: 172.62,2.93 172.62,70.42 133.38,70.42 133.36,70.44 91.27,112.52 -1.12,112.52 -1.12,-1.62 168.07,-1.62
  pour Bottom: -0.77,113.82 -2.06,112.54 -2.08,112.52 -2.12,112.52 -2.12,-3.27 -1.97,-3.42 173.77,-3.42 174.62,-2.57 174.62,72.02 174.64,72.04 175.22,72.62 134.38,72.62 134.36,72.64 93.17,113.82
GPIO8  (via drill 0.3)
  Top 0.127: v15.72,42.24 13.75,42.24 R1.1 | v17.18,43.7 18.96,45.48 18.96,45.74 U2.10
  Bottom 0.127: v17.18,43.7 v15.72,42.24
I2C_PW  (via drill 0.3)
  Top 0.127: C1.1 152.82,5.67 154.15,5.67 C2.1 154.22,5.67 155.55,5.67 R1_PINH.2 155.61,5.67 157.07,5.67 R2_PINH.2 157.14,5.6 157.14,5.41 157.77,4.78 157.77,3.89 157.64,3.76 152.31,3.76 151.61,4.46 151.61,6.56 153.64,8.59 SENSOR2.8 153.64,8.65 153.64,10.11 153.2,10.56 153.2,12.08 153.23,12.11 | 153.23,12.11 153.39,12.27 154.03,12.27 154.47,11.83 154.47,11.57 SENSOR2.2 154.53,11.51 154.53,11.32 155.29,10.56 155.29,8.65 SENSOR2.6 | v29.76,54.75 21.56,62.95 21.56,63.2 U2.17 | v89.44,45.48 89.7,45.48 123.04,12.15 153.2,12.15 153.23,12.11
  Bottom 0.127: v29.76,54.75 79.54,54.75 88.81,45.48 v89.44,45.48
INT_RTC  (via drill 0.3)
  Top 0.127: R1_PINH1.2 86.97,61.17 86.97,59.2 U3.3 86.91,59.14 86.91,58.82 74.2,46.12 v43.47,46.12 | v16.48,42.05 16.48,45.74 U2.8 | v16.48,40.28 16.48,38.94 TP15.TP
  Bottom 0.127: v16.48,40.28 v16.48,42.05 39.41,42.05 v43.47,46.12
IO/BOOT  (via drill 0.3)
  Top 0.127: R_BOOT.1 20.93,109.3 22.2,109.3 BOOT_BUTTON.4 22.26,109.3 23.53,109.3 24.48,108.35 24.67,108.35 v24.67,108.28 25.69,109.3 BOOT_BUTTON.3 25.76,109.3 25.88,109.17 27.15,109.17 C6.1 | v24.1,79.65 24.1,63.26 U2.15
  Bottom 0.127: v24.1,79.65 24.1,107.71 v24.67,108.28
IO/CHANGE  (via drill 0.3)
  Top 0.127: C10.1 52.17,109.36 50.77,109.36 CHANGE_BUTTON.3 50.71,109.3 49.63,109.3 49.12,108.79 47.79,108.79 47.28,109.3 CHANGE_BUTTON.4 47.22,109.3 45.95,109.3 R_CHANGE.1 45.88,109.24 45.5,108.86 v45.06,108.86 | v13.94,68.85 13.94,63.26 U2.23
  Bottom 0.127: v13.94,68.85 45.06,99.97 v45.06,108.86
MISO  (via drill 0.3)
  Top 0.127: D12.2 11.72,105.55 10.58,105.55 8.8,107.33 7.85,107.33 R8.1 7.85,107.27 7.53,106.95 v7.53,106.63 | v4.86,103.97 4.86,101.55 5.5,100.92 5.82,100.92 J4.P7 | v32.36,55.77 31.72,55.13 U1.2 | v43.79,59.33 44.74,60.28 TP6.TP | v16.04,55.77 8.86,62.95 8.86,63.2 U2.27 8.8,63.26 8.8,63.52 v4.93,67.39
  Bottom 0.127: v7.53,106.63 v4.86,103.97 4.93,103.97 v4.93,67.39 | v43.79,59.33 40.23,55.77 v32.36,55.77 v16.04,55.77
MOSI  (via drill 0.3)
  Top 0.127: U1.5 37.82,52.59 33.37,48.15 D11.2 R7.1 30.64,48.15 30.26,48.53 v29.88,48.53 | v16.04,44.59 15.21,45.42 15.21,45.74 U2.7 | v82.21,14.49 82.21,15.19 J1.14 | J4.P3 5.88,96.47 7.91,96.47 43.34,61.04 43.34,53.48 44.17,52.66 TP7.TP 44.23,52.59 45.12,51.71 v45.12,51.58 42.84,49.29 v42.84,48.98
  Bottom 0.127: v16.04,44.59 16.48,44.59 16.93,44.15 24.8,44.15 29.18,48.53 v29.88,48.53 42.39,48.53 v42.84,48.98 | v45.12,51.58 v82.21,14.49
N$1  (via drill 0.3)
  Top 0.127: C4.1 91.54,34.62 90.78,34.62 86.91,30.75 85.89,30.75 D4.1 85.83,30.75 v83.6,30.75 | v78.46,35.89 77.51,35.89 D3.2
  Bottom 0.127: v83.6,30.75 v78.46,35.89
N$2  (via drill 0.3)
  Top 0.127: v149.64,45.93 146.59,45.93 R2-USB1.2 | v165.01,52.47 164.57,52.91 164.06,52.91 J2.A5
  Bottom 0.127: v149.64,45.93 158.47,45.93 v165.01,52.47
N$3  (via drill 0.3)
  Top 0.127: v122.53,50.94 120.75,49.17 R1_BAT.2 | v123.61,51.39 123.61,51.96 123.54,52.02 MCP73831.1
  Bottom 0.127: v122.53,50.94 123.16,50.94 v123.61,51.39
N$4  (via drill 0.3)
  Top 0.127: v114.59,40.53 115.1,40.02 115.29,40.02 C1_BAT1.1 | v114.46,41.55 115.03,41.55 115.29,41.8 D2.1 115.35,41.86 115.42,41.93 117.38,41.93 IC4.3 117.45,41.93 118.08,42.56 118.08,43.26 118.05,43.29 | 118.05,43.29 117.89,43.45 117.83,43.45 117.45,43.83 IC4.1 | 118.05,43.29 119.16,44.4 124.88,44.4 128.94,48.47 129.7,48.47 Q1.2
  Bottom 0.127: v114.59,40.53 114.59,41.42 v114.46,41.55
N$5
  Top 0.127: CHG_LED.C 116.88,53.87 116.88,52.85 117.38,52.34 117.38,51.45 118.34,50.5 120.69,50.5 R1_BAT.1
N$6
  Top 0.127: R2_BAT.2 117.96,52.02 120.88,52.02 MCP73831.5
N$7
  Top 0.127: J1.24 77.19,15.26 73.13,15.26 69.76,18.62 EPD_C12.2
N$8  (via drill 0.3)
  Top 0.127: v79.28,21.99 79.28,15.26 J1.20 | v79.86,23.45 79.03,23.45 EPD_C8.2
  Bottom 0.127: v79.28,21.99 79.28,22.88 v79.86,23.45
N$9
  Top 0.127: J1.22 78.2,15.26 78.2,17.23 76.75,18.69 76.75,22.05 75.35,23.45 EPD_C10.2
N$10  (via drill 0.3)
  Top 0.127: v79.79,22.31 79.79,15.26 J1.19 | v80.3,24.08 80.43,24.08 81,23.51 EPD_C7.2
  Bottom 0.127: v79.79,22.31 79.79,22.75 80.3,23.26 v80.3,24.08
N$11  (via drill 0.3)
  Top 0.127: v80.3,21.35 80.3,15.26 J1.18 | v82.14,23.2 82.71,23.2 82.97,23.45 EPD_C6.2
  Bottom 0.127: v82.14,23.2 v80.3,21.35
N$12  (via drill 0.3)
  Top 0.127: v155.8,52.47 148.31,52.47 R2-USB.1 | v165.01,55.52 164.63,55.9 164.06,55.9 J2.B5
  Bottom 0.127: v155.8,52.47 161.96,52.47 v165.01,55.52
N$13
  Top 0.127: J1.5 86.78,15.26 86.78,23.13 EPD_C2.2
N$14
  Top 0.127: J1.4 87.29,15.26 87.29,21.8 88.94,23.45 EPD_C1.2
N$18
  Top 0.127: IC1.5 50.01,101.81 50.96,101.81 51.79,102.63 C_DELAY.1
N$19
  Top 0.127: R_CAPACITOR.2 91.86,60.41 90.97,60.41 88.62,62.76 D7.1
PREVGH  (via drill 0.3)
  Top 0.127: v78.71,22.31 78.71,15.26 J1.21 | v78.02,23.2 77.51,23.2 77.25,23.45 EPD_C9.2 | v86.4,31.51 89.44,34.56 D5.1
  Bottom 0.127: v78.71,22.31 78.71,22.5 v78.02,23.2 78.08,23.2 v86.4,31.51
PREVGL  (via drill 0.3)
  Top 0.127: 74.3,19.03 74.14,19.19 68.87,19.19 68.36,18.69 EPD_C11.2 | 74.3,19.03 77.7,15.64 77.7,15.26 J1.23 | v83.86,25.23 89.32,30.69 D4.2 | 74.3,19.03 v76.3,21.03
  Bottom 0.127: v83.86,25.23 83.35,25.23 79.16,21.03 v76.3,21.03
RESE  (via drill 0.3)
  Top 0.127: v86.84,13.99 87.73,14.88 87.73,15.19 J1.3 | v69.51,16.27 68.68,17.1 R3.2 | v67.16,17.42 66.46,17.42 Q3.2
  Bottom 0.127: v86.84,13.99 84.36,13.99 83.6,13.23 72.55,13.23 v69.51,16.27 68.36,17.42 v67.16,17.42
RESE'  (via drill 0.3)
  Top 0.127: R3.1 69.95,16.08 67.73,13.86 67.54,13.86 R2.2 67.47,13.8 67.28,13.61 v66.65,13.61 | v63.79,13.61 63.98,13.42 63.98,12.46 SJ1.2
  Bottom 0.127: v66.65,13.61 v63.79,13.61
RESET  (via drill 0.3)
  Top 0.127: R_RESET.1 67.09,109.17 65.82,109.17 65.76,109.24 RESET_BUTTON.3 65.7,109.24 64.81,109.24 64.11,108.54 62.97,108.54 62.27,109.24 RESET_BUTTON.4 62.2,109.24 v57.57,109.24 | v52.93,104.6 50.01,104.6 IC1.1 | v61.5,105.24 66.27,105.24 66.9,105.87 67.09,105.87 C5.1 | v10.13,50.37 10.13,45.8 U2.3
  Bottom 0.127: v61.5,105.24 57.57,109.17 v57.57,109.24 v52.93,104.6 10.13,61.8 v10.13,50.37
RTC_RST  (via drill 0.3)
  Top 0.127: v25.18,60.6 22.83,62.95 22.83,63.2 U2.16 | v84.56,60.6 85.64,59.52 85.64,59.2 U3.4
  Bottom 0.127: v84.56,60.6 v25.18,60.6
RX
  Top 0.127: U2.24 12.61,63.26 12.61,69.99 12.42,70.18 TP2.TP
SCK  (via drill 0.3)
  Top 0.127: 25.31,45.99 25.31,42.31 20.67,37.67 15.21,37.67 14.01,38.88 TP8.TP 13.94,38.94 12.74,40.15 11.66,40.15 6.64,45.16 6.64,63.01 4.23,65.42 4.23,97.62 5.31,98.7 J4.P5 | 25.31,45.99 25.31,46.75 25.06,47.01 14.9,47.01 13.94,46.05 13.94,45.8 U2.6 | v80.68,14.18 80.81,14.05 82.4,14.05 82.71,14.37 82.71,15.19 J1.13 | v61.76,33.1 47.73,33.1 47.22,33.61 R6.1 47.22,33.67 47.22,35.89 D10.2 | v41.95,51.45 40.65,52.75 | 40.65,52.75 39.53,53.87 U1.6 | v25.12,45.99 25.31,45.99 | 40.65,52.75 v39.28,51.39
  Bottom 0.127: v80.68,14.18 v61.76,33.1 43.41,51.45 v41.95,51.45 | v25.12,45.99 25.37,45.99 30.77,51.39 v39.28,51.39
SCL  (via drill 0.3)
  Top 0.127: v156.37,5.03 156.44,5.03 157.07,4.4 R2_PINH.1 | v156.37,10.69 156.37,11.26 156.12,11.51 SENSOR2.4 | v163.36,19.26 164.76,20.65 165.07,20.65 J3.4 | 133.23,55.1 133.26,55.13 133.26,55.58 128.94,59.9 104.05,59.9 95.22,51.07 91.6,51.07 90.4,49.86 v90.14,49.86 89.51,49.86 U3.16 | 133.23,55.1 133.01,54.88 132.69,54.88 U4.7 | v25.37,55.33 17.75,62.95 17.75,63.2 U2.20 | v137.64,55.07 133.26,55.07 133.23,55.1
  Bottom 0.127: v156.37,5.03 v156.37,10.69 163.36,17.67 v163.36,19.26 163.36,29.35 v137.64,55.07 | v25.37,55.33 82.4,55.33 87.86,49.86 v90.14,49.86
SDA  (via drill 0.3)
  Top 0.127: 157.8,9.13 166.03,17.35 166.03,19.07 165.45,19.64 165.14,19.64 J3.3 | 157.8,9.13 156.31,7.64 153.71,7.64 152.12,6.05 152.12,5.22 152.25,5.1 154.53,5.1 155.23,4.4 155.55,4.4 R1_PINH.1 | v156.82,10.11 156.31,10.11 155.36,11.07 155.36,11.51 SENSOR2.3 | v157.77,9.16 157.8,9.13 | v131.42,55.64 132.05,55.64 132.31,55.39 132.62,55.39 U4.8 | v88.56,51.71 88.56,50.18 88.24,49.86 U3.15 | v22.2,59.77 19.02,62.95 19.02,63.2 U2.19
  Bottom 0.127: v157.77,9.16 v156.82,10.11 156.88,10.11 156.88,10.81 163.8,17.73 163.8,29.54 137.7,55.64 v131.42,55.64 92.49,55.64 v88.56,51.71 88.56,51.77 80.56,59.77 v22.2,59.77
SRC  (via drill 0.3)
  Top 0.127: C4.2 91.54,35.89 87.22,35.89 85.95,34.62 D5.2 85.89,34.56 v82.52,31.2 | v74.01,24.78 72.75,23.51 71.6,23.51 71.47,23.64 71.47,24.66 71.22,24.91 70.08,24.91 65.82,20.65 65.82,19.58 Q3.3 | v79.16,29.93 79.16,33.48 L1.1
  Bottom 0.127: v74.01,24.78 v79.16,29.93 80.43,31.2 v82.52,31.2
SS_SD
  Top 0.127: R10.1 45.31,33.67 45.31,35.89 D8.2 45.25,35.96 38.33,35.96 26.77,47.52 15.15,47.52 | 15.15,47.52 12.86,47.52 11.4,46.05 11.4,45.8 U2.4 | 15.15,47.52 15.15,54.69 14.96,54.88 14.39,54.88 6.89,62.37 6.89,63.14 4.48,65.55 4.48,94.38 5.5,95.39 6.2,95.39 J4.P2
TX
  Top 0.127: U2.25 11.34,63.26 11.34,69.17 10.32,70.18 TP1.TP
USB_D+  (via drill 0.3)
  Top 0.127: v139.86,50.94 143.93,50.94 D1.1 | v43.15,46.63 v51.34,46.63 | v24.74,43.7 24.74,45.1 24.1,45.74 U2.14
  Bottom 0.127: v139.86,50.94 123.54,50.94 117.64,45.04 52.93,45.04 v51.34,46.63 | v43.15,46.63 27.66,46.63 v24.74,43.7
USB_D-  (via drill 0.3)
  Top 0.127: v142.97,49.1 143.93,49.1 D1.3 | v52.55,44.78 44.17,44.78 v42.84,46.12 | v24.1,43.7 24.1,44.21 22.83,45.48 22.83,45.74 U2.13
  Bottom 0.127: v142.97,49.1 122.08,49.1 117.77,44.78 v52.55,44.78 | v42.84,46.12 27.79,46.12 24.93,43.26 24.55,43.26 v24.1,43.7
VBAT
  Top 0.3: U4.2 130.72,54.82 130.72,54.37 U4.3 130.59,54.31 130.28,54.31 128.81,52.85 | 128.81,52.85 128.81,50.63 Q1.3 | C2_BAT.1 126.47,54.63 124.18,54.63 123.54,53.99 MCP73831.3 | TP3.TP 126.47,58.63 126.47,54.75 C2_BAT.1 | 128.81,52.85 128.69,52.91 128.37,52.91 126.66,54.63 C2_BAT.1
VBUS
  Top 0.3: 145.26,48.47 145.26,49.17 146.09,49.99 146.4,49.99 D1.5 146.59,49.99 147.55,49.99 148.5,49.04 150.66,49.04 TP14.TP | 145.26,48.47 145.26,47.45 C4_USB.1 | 142.85,48.47 142.28,49.04 140.94,49.04 C5_USB.1 140.75,49.04 130.47,49.04 130.28,49.23 128.69,49.23 127.99,48.53 Q1.1 127.8,48.53 125.7,48.53 120.94,53.29 120.94,53.8 MCP73831.4 120.88,53.93 118.4,53.93 CHG_LED.A 118.21,53.93 117.51,54.63 114.27,54.63 113.58,53.93 C1_BAT.1 113.64,53.8 113.64,43.39 | 145.26,48.47 142.85,48.47 | PFMF.050.1.2 142.15,47.7 142.78,48.34 142.85,48.47 | 113.64,43.39 114.78,43.39 115.29,43.9 D2.2 | 113.64,43.39 112.81,43.39 R1_PWRUSB.2
VRTC  (via drill 0.3)
  Top 0.127: C8.2 92.11,51.83 94.27,51.83 94.72,52.28 C10_SUPERCAP.1 | R_CAPACITOR.1 91.92,59.07 91.92,52.09 92.11,51.9 C8.2 | v87.09,51.26 86.97,51.13 86.97,49.86 U3.14 | v91.16,51.26 91.92,52.02 C8.2
  Bottom 0.127: v91.16,51.26 v87.09,51.26
VUSB
  Top 0.3: J2.A4 164.06,51.71 164.06,51.9 J2.B9 163.93,51.96 163.36,51.96 162.85,52.47 | J2.A9 164.06,56.72 164.06,56.47 J2.B4 163.93,56.41 163.36,56.41 162.85,55.9 162.85,52.47 | 162.85,52.47 162.72,52.41 156.88,52.41 147.74,43.26 146.66,43.26 PFMF.050.1.1
(copper drawn outside any net)
  shapes: Top area x5